# EAGLE board Self Designed Schematic (EAGLE 9.4.2)
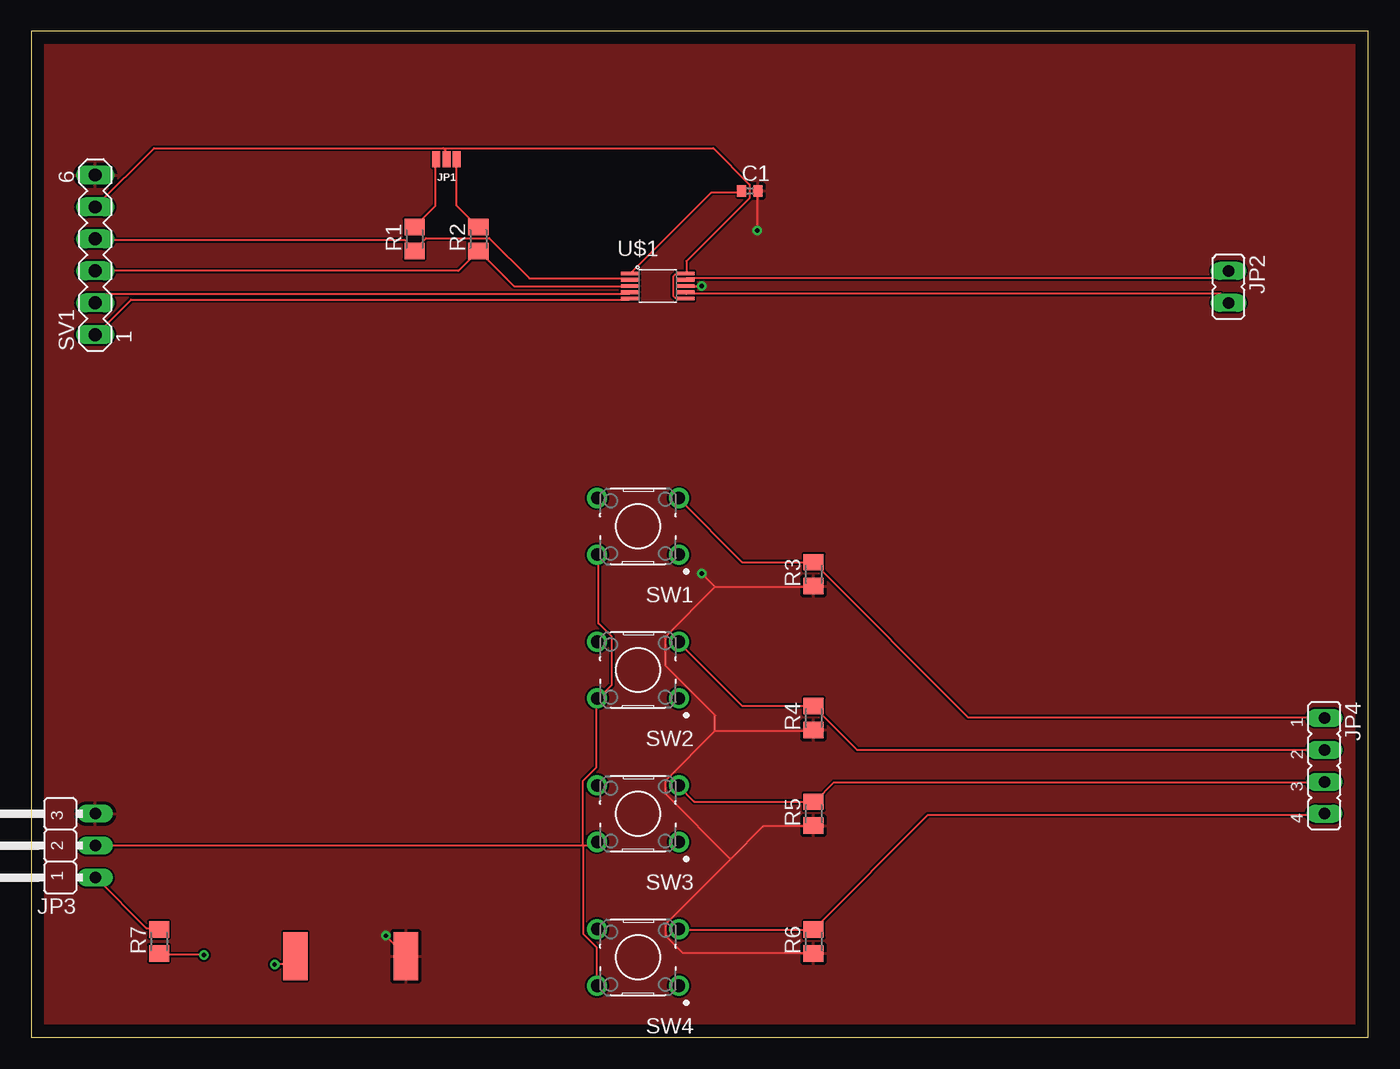
[diagram p0: board, top side]
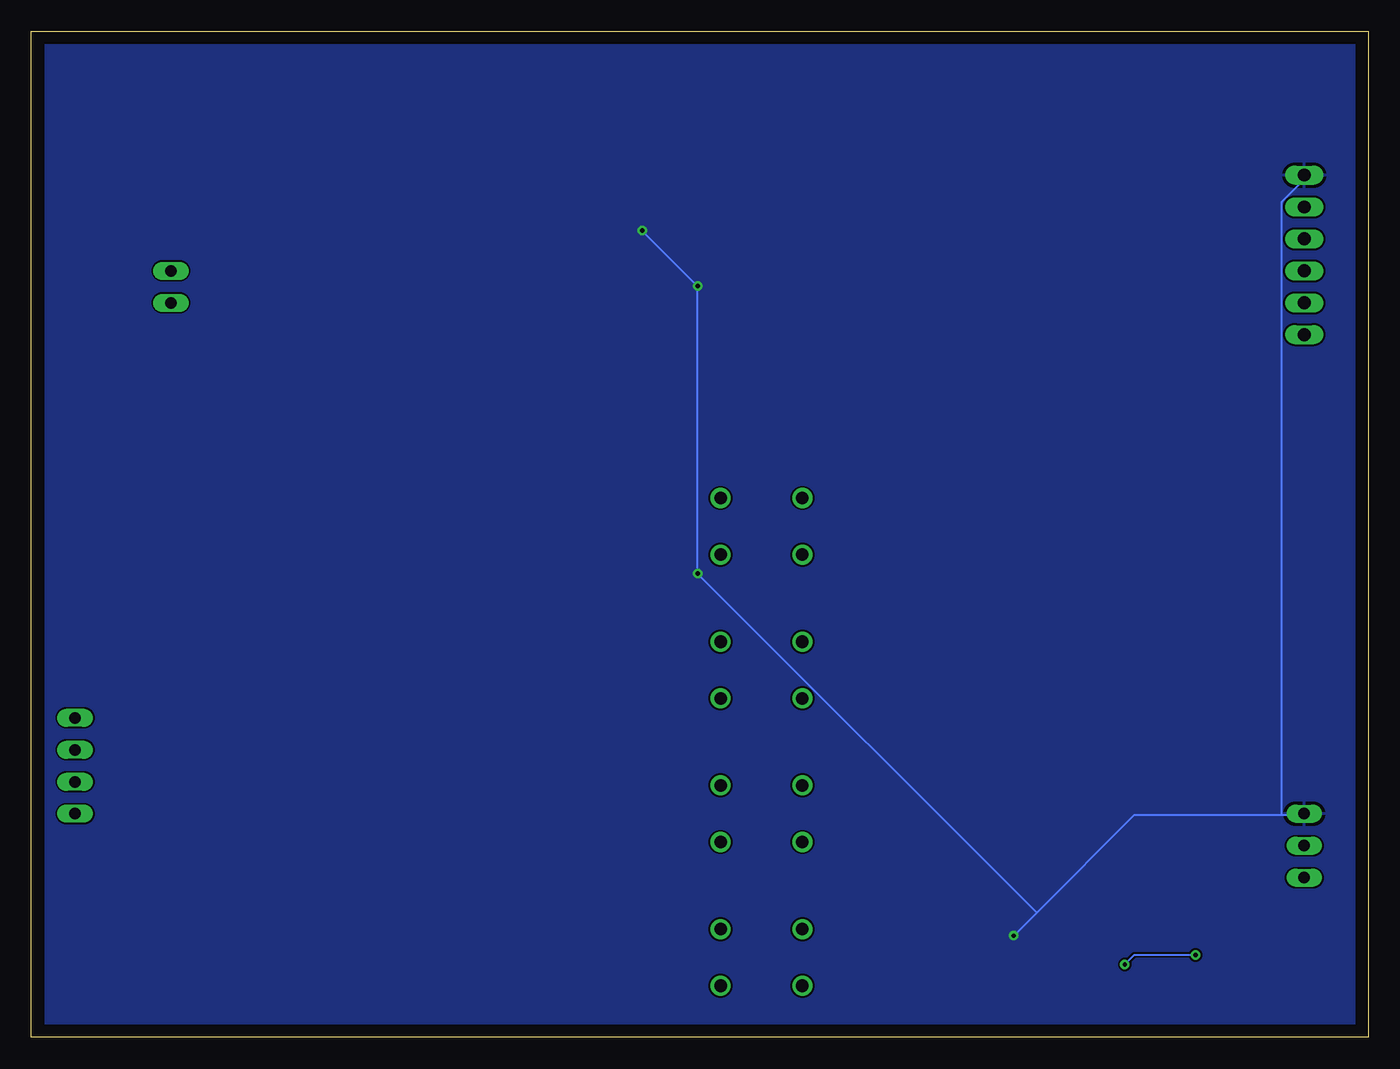
[diagram p1: board, bottom side, seen from below]

Size 106.35 x 80 mm. Coordinates in mm from the lower left corner, seen from the top.
Outline: 0,0 106.35,0 106.35,80 0,80 0,0
Copper layers (1*16): Top 0.035mm / dielectric 1.5mm / Bottom 0.035mm
Design rules "default": minimum track width 6mil, minimum drill 0.35mm, track to track 6mil, track to pad 6mil, pad to pad 6mil, via to via 6mil, smd to smd 6mil, copper to edge 40mil, drill to drill 6mil, minimum pad ring 10mil, minimum via ring 8mil, stop-mask expansion 4mil, vias tented up to drill 0mil, thermal gap 10mil

## Footprints (pad centres in the part's own frame; a part is rotated, then mirrored left to right if it is on the bottom)
C0402 = smd 0.7 x 0.9: 1 -0.65,0; 2 0.65,0
SMT-JUMPER_3_2-NC_PASTE_NO-SILK = smd 0.635 x 1.27: 1 -0.813,0; 2 0,0; 3 0.813,0
JP1 = drill 0.914 long: 1 0,-1.27; 2 0,1.27
JP2W = drill 0.914 long: 1 -2.54,-1.27; 2 0,-1.27; 3 2.54,-1.27
JP4 = drill 0.914 long: 1 -3.81,0; 2 -1.27,0; 3 1.27,0; 4 3.81,0
M0805 = smd 1.3 x 1.6: 1 -0.95,0; 2 0.95,0
MA06-1 = drill 1.016 long: 1 -6.35,0; 2 -3.81,0; 3 -1.27,0; 4 1.27,0; 5 3.81,0; 6 6.35,0
B3F-1000 = drill 1 pad 1.6: 1 -3.25,2.25; 2 3.25,2.25; 3 -3.25,-2.25; 4 3.25,-2.25
VSSOP-10 = smd 1.45 x 0.3: P$1 -1.905,1.06; P$2 -1.905,0.56; P$3 -1.905,0.06; P$4 -1.905,-0.44; P$5 -1.905,-0.94; P$6 2.495,-0.94; P$7 2.495,-0.44; P$8 2.495,0.06; P$9 2.495,0.56; P$10 2.495,1.06
PIEZOBUZZER = smd 1.93 x 3.81: P$1 -4.4,0.1; P$2 4.4,0.1

## Placement (x,y rotation side)
C1  [C0402]  57.15,67.31 0 top
JP1  JUMPER-SMT_3_2-NC_PASTE_NO-SILK  [SMT-JUMPER_3_2-NC_PASTE_NO-SILK]  33.02,69.85 180 top
JP2  [JP1]  95.25,59.69 180 top
JP3  [JP2W]  3.81,15.24 90 top
JP4  [JP4]  102.87,21.59 270 top
R1  [M0805]  30.48,63.5 90 top
R2  [M0805]  35.56,63.5 90 top
R3  [M0805]  62.23,36.83 90 top
R4  [M0805]  62.23,25.4 90 top
R5  [M0805]  62.23,17.78 90 top
R6  [M0805]  62.23,7.62 90 top
R7  [M0805]  10.16,7.62 90 top
SV1  [MA06-1]  5.08,62.23 90 top
SW1  B3F-1000  [B3F-1000]  48.26,40.64 180 top
SW2  B3F-1000  [B3F-1000]  48.26,29.21 180 top
SW3  B3F-1000  [B3F-1000]  48.26,17.78 180 top
SW4  B3F-1000  [B3F-1000]  48.26,6.35 180 top
U$1  DRV2605L  [VSSOP-10]  49.53,59.69 0 top
U$2  PIEZOBUZZER  [PIEZOBUZZER]  25.4,6.35 0 top

## Library data of the parts
C1 = adafruit
JP1 = SparkFun-Jumpers
JP2-JP4 = jumper
R1-R7 = BeagleBone_Black_Wireless
SV1 = con-lstb; OC_FARNELL: unknown; OC_NEWARK: unknown
SW1-SW4 = Switch; CREATED_BY: PCBLayout.com; DIGI_KEY_PART_NUMBER: SW400-ND; MANUFACTURER: Omron Electronics Inc-EMC Div; MPN: B3F-1000; PACKAGE: SPST-NO
U$1 = SparkFun-IC-Special-Function; PROD_ID: IC-13504
U$2 = piezobuzzerlayout

## Nets
GND: C1.2 JP3.3 R3.1 R4.1 R5.1 R6.1 SV1.6 U$1.P$8 U$2.P$2
N$1: R1.1 SV1.4 U$1.P$2
N$2: R2.1 SV1.3 U$1.P$3
N$3: SV1.2 U$1.P$4
N$4: SV1.1 U$1.P$5
N$5: C1.1 U$1.P$1
N$6: JP1.3 R1.2
N$7: JP1.1 R2.2
N$8: JP2.1 U$1.P$9
N$9: JP2.2 U$1.P$7
N$10: JP3.2 SW1.2 SW2.2 SW3.2 SW4.2
N$11: JP4.4 R6.2 SW4.3
N$12: JP4.3 R5.2 SW3.3
N$13: JP4.2 R4.2 SW2.3
N$14: JP4.1 R3.2 SW1.3
N$15: JP3.1 R7.2
N$16: R7.1 U$2.P$1
VCC: JP1.2 SV1.5 U$1.P$6 U$1.P$10

## Tracks (layer width: path | path; a pad name or v marks a point on that pad's centre or on a via)
GND  (via drill 0.35)
  Top 0.152: v57.76,64.16 57.76,67.21 C1.2 | v53.34,59.74 52.12,59.74 U$1.P$8 | 55.63,14.17 58.22,16.76 62.18,16.76 R5.1 | 55.63,14.17 50.44,8.99 50.44,8.08 51.82,6.71 62.18,6.71 R6.1 | 54.41,24.38 62.18,24.38 R4.1 | 54.41,24.38 50.44,20.42 50.44,19.36 55.63,14.17 | 54.41,35.81 62.18,35.81 R3.1 | 54.41,35.81 50.44,31.85 50.44,29.57 54.41,25.6 54.41,24.38 | 54.41,35.81 v53.34,36.88 | v28.19,8.08 29.72,6.55 U$2.P$2
  Bottom 0.152: v57.76,64.16 v53.34,59.74 v53.34,36.88 26.36,9.91 | 6.86,17.68 18.59,17.68 26.36,9.91 | 6.86,17.68 5.18,17.68 JP3.3 | v28.19,8.08 26.36,9.91 | 6.86,17.68 6.86,66.45 5.18,68.12 5.18,68.58 SV1.6
  pour Bottom (isolate 0): 0,80.01 105.41,80.01 105.41,0 0,0
  pour Top (isolate 0): 0,80.01 106.68,80.01 106.68,0 0,0
N$1
  Top 0.152: 30.48,62.64 31.39,63.55 36.42,63.55 39.62,60.35 47.55,60.35 U$1.P$2 | 30.48,62.64 29.72,63.4 5.18,63.4 SV1.4 | 30.48,62.64 R1.1
N$2
  Top 0.152: U$1.P$3 47.55,59.74 38.41,59.74 35.66,62.48 R2.1 35.51,62.48 33.98,60.96 SV1.3
N$3
  Top 0.152: SV1.2 5.79,59.13 47.55,59.13 U$1.P$4
N$4
  Top 0.152: U$1.P$5 47.55,58.67 7.92,58.67 5.18,55.93 SV1.1
N$5
  Top 0.152: C1.1 56.39,67.21 54.1,67.21 47.7,60.81 U$1.P$1
N$6
  Top 0.152: JP1.3 32.16,69.8 32.16,66.14 30.48,64.47 R1.2
N$7
  Top 0.152: JP1.1 33.83,66.14 35.51,64.47 R2.2
N$8
  Top 0.152: JP2.1 94.64,60.35 52.12,60.35 U$1.P$9
N$9
  Top 0.152: U$1.P$7 52.12,59.13 94.64,59.13 95.25,58.52 JP2.2
N$10
  Top 0.152: 43.89,15.24 44.81,15.24 44.96,15.39 SW3.2 | 43.89,15.24 JP3.2 | 43.89,15.24 43.89,8.23 44.96,7.16 44.96,4.12 SW4.2 | 43.89,15.24 43.89,20.42 44.96,21.49 44.96,26.82 SW2.2 45.11,26.98 46.18,28.04 46.18,31.85 45.11,32.92 45.11,38.25 SW1.2
N$11
  Top 0.152: SW4.3 51.51,8.53 62.18,8.53 R6.2 62.33,8.69 71.32,17.68 102.87,17.68 JP4.4
N$12
  Top 0.152: SW3.3 51.51,19.96 52.73,18.75 62.18,18.75 R5.2 62.33,18.75 63.86,20.27 102.87,20.27 JP4.3
N$13
  Top 0.152: SW2.3 51.51,31.39 56.54,26.36 62.18,26.36 R4.2 62.33,26.21 65.68,22.86 JP4.2
N$14
  Top 0.152: SW1.3 51.51,42.82 56.54,37.8 62.18,37.8 R3.2 62.33,37.64 74.52,25.45 102.87,25.45 JP4.1
N$15
  Top 0.152: R7.2 10.06,8.69 9.14,8.69 5.18,12.65 JP3.1
N$16  (via drill 0.35)
  Top 0.152: v13.72,6.55 10.21,6.55 R7.1 | v19.36,5.79 20.27,5.79 20.88,6.4 U$2.P$1
  Bottom 0.152: v13.72,6.55 18.59,6.55 v19.36,5.79
VCC
  Top 0.152: U$1.P$6 51.97,58.83 51.21,58.83 51.05,58.98 51.05,60.5 51.21,60.66 51.97,60.66 U$1.P$10 52.12,60.81 52.12,61.72 57.15,66.75 57.15,67.82 54.25,70.71 32.77,70.71 | 32.77,70.71 32.92,70.56 32.92,69.95 JP1.2 | 32.77,70.71 9.75,70.71 SV1.5

## Text on the board
tStop: Embeded Style | Luis, Dante, Tyler | GND | VCC | SDA | -O | SCL | IN/TRIG | +O | EN | START/STOP | TOGGLE UP | OUT1 | OUT2 | OUT3 | GND | TOGGLE DOWN | OUT4 | PIN | PIEZO | MENU